# Altium PCB Palletto_V2.PcbDoc (part 1 of 2)
Units mil, origin at the board's own origin, x right, y up, seen from the top; angles counter-clockwise.
Board outline 7345 x 9595 mil, 2 copper layers (Top Layer, Bottom Layer); 77 components, 98 nets, 384 pads, 99 vias.
Unrouted connection lines stored in the file: 1.
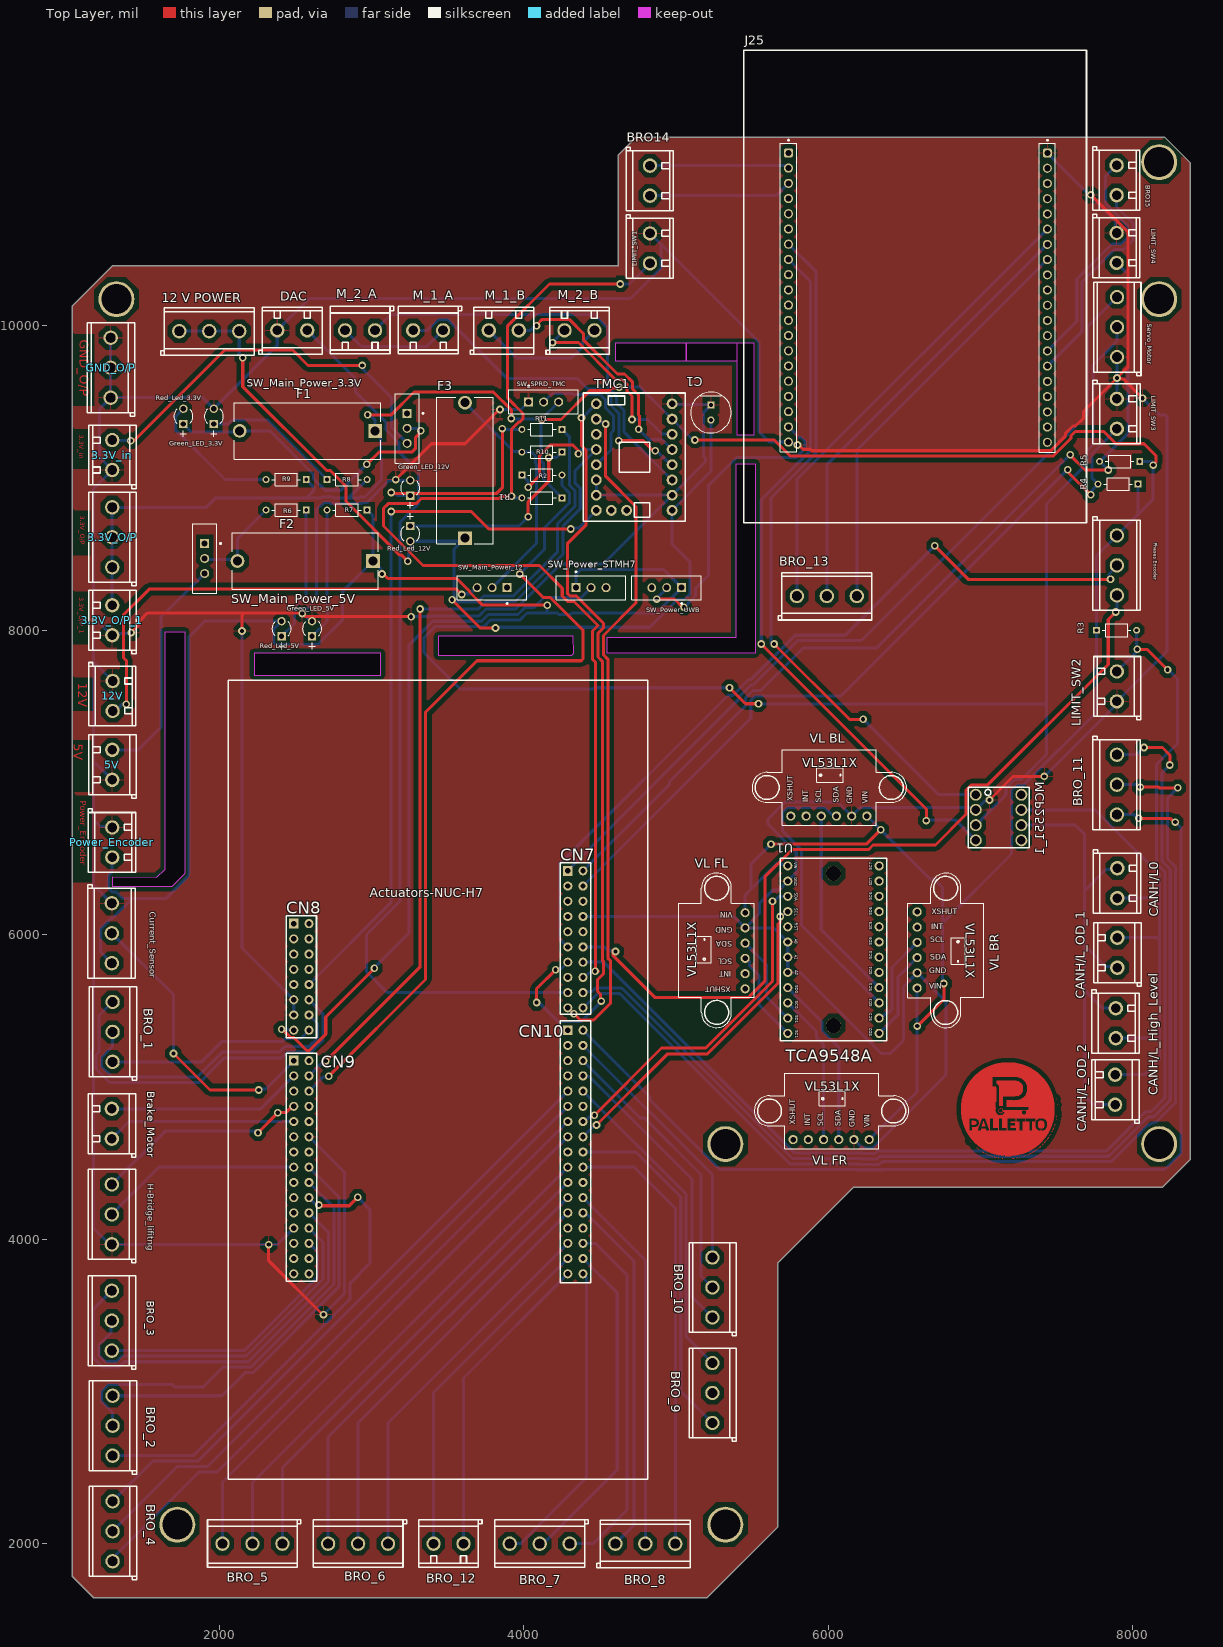
[diagram p0: Top Layer view]
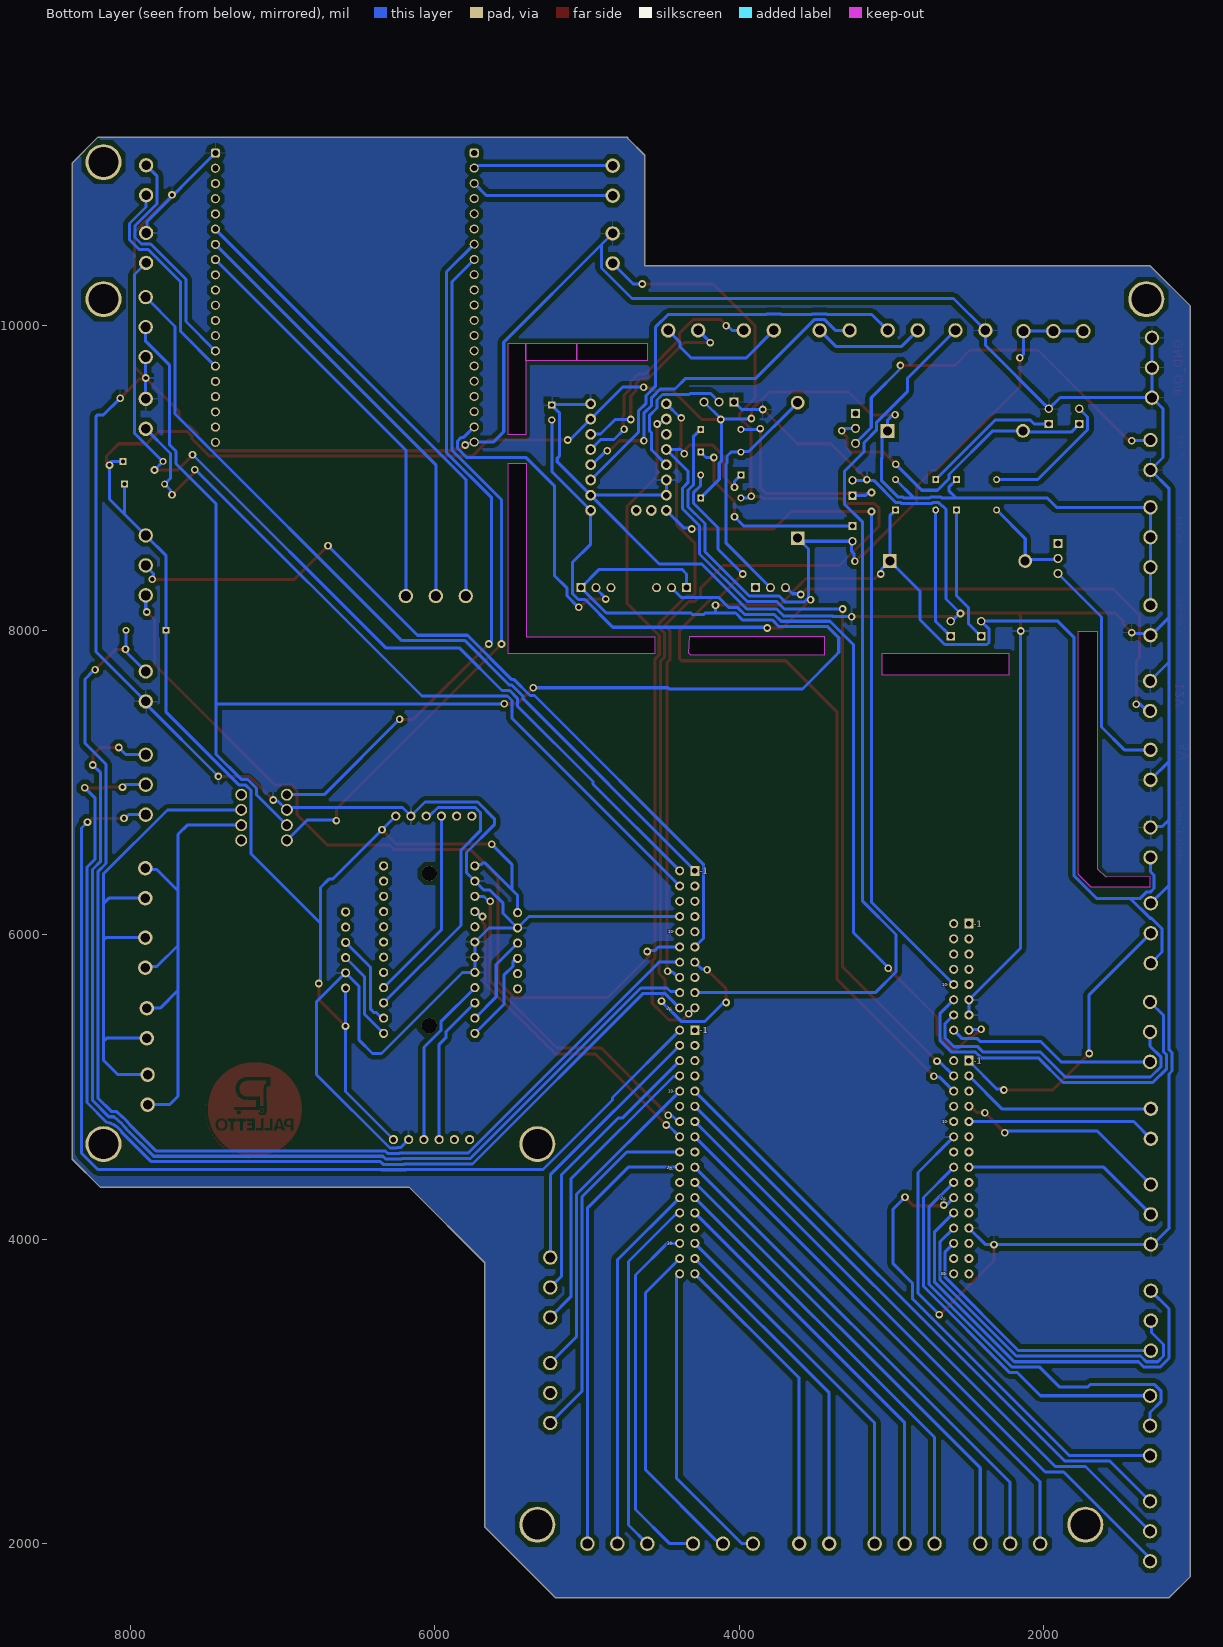
[diagram p1: Bottom Layer view, seen from below]

## Layer stack, top to bottom
Top Solder: solder mask 0.4, Solder Resist, Dk 3.5
Top Layer: signal copper 1.4
Dielectric 1: dielectric 12.6, FR-4, Dk 4.8
Bottom Layer: signal copper 1.4
Bottom Solder: solder mask 0.4, Solder Resist, Dk 3.5

## Board outline
4730,11240 4730,11230 4620,11120 4620,10395 1300,10395 1035,10130 1035,1785 1175,1645 5205,1645 5670,2110 5670,3845 6165,4340 8195,4340 8380,4525 8380,11070 8210,11240
cut-out: 3060,7850 2230,7850 2230,7705 3060,7705
cut-out: 4325,7960 3440,7960 3440,7835 4315,7835 4330,7850
cut-out: 5520,9095 5520,7850 4550,7850 4550,7955 5395,7955 5395,9095
cut-out: 5067.5,9770 5067.5,9885 4602.5,9885 4602.5,9770
cut-out: 5402.5,9770 5402.5,9885 5067.5,9885 5067.5,9770
cut-out: 5400,9285 5515,9285 5515,9885 5400,9885
cut-out: 1775,7990 1775,6400 1690,6315 1300,6315 1300,6380.19 1589.48,6378.84 1645,6430.67 1645,7990 1660,7990

## Design rules (kind name [scope] priority, off if disabled: settings)
Clearance Clearance_Polygon [InPolygon] p1: gap=27.56 ignorepadtopadclearanceinfootprint=TRUE
Clearance Clearance_1 [All] p2: gap=15.75 ignorepadtopadclearanceinfootprint=FALSE except(23.62: Fill-Fill Fill-Poly Fill-Region Fill-Text Fill-Hole Poly-Poly Poly-Region Poly-Text Poly-Hole Region-Region Region-Text Region-Hole)
HoleSize [All] p1: absolutevalues=TRUE maxlimit=1000 minlimit=1 maxpercent=80.000 minpercent=20.000
MinimumSolderMaskSliver [All] p1: minsoldermaskwidth=0
PlaneClearance [All] p1: clearance=30
PlaneConnect [All] p1: planeconnectstyle=Relief reliefexpansion=20 reliefentries=4 reliefconductorwidth=10 reliefairgap=30
PolygonConnect [All] p1: connectstyle=Relief reliefconductorwidth=10 reliefentries=4 polygonreliefangle="90 Angle" airgapwidth=30
RoutingVias [All] p1: holewidth=28 width=59.06 viastyle="Through Hole" minholewidth=23.62 minwidth=55.12 maxholewidth=30 maxwidth=65
SilkToSilkClearance [All] p1: silktosilkclearance=0
SilkToSolderMaskClearance [IsPad] p1: minsilkscreentomaskgap=0 clearancetoexposedcopper=TRUE
SolderMaskExpansion [All] p1: expansion=4 istentingtop=FALSE
UnRoutedNet [All] p1: checkbadconnections=TRUE
Width [All] p1: maxlimit=118.11 minlimit=15.75 preferedwidth=20 bottomlayer_maxwidth=118.11 minimp=50.000000 maximp=50.000000 favimp=50.000000
23 further rules are at their usual default settings.

## Classes and differential pairs
component class STM32H755_Breakout_Schematic: Actuators-NUC-H7 R2 SW_Power_STMH7
component class Sensors_Schematic: "12 V POWER" 12V 12V_IN C1 Current_Sensor F3 Green_LED_12V J25 M_1_A M_1_B M_2_A M_2_B R10 R11 Red_Led_12V Servo_Motor SW_Main_Power_12 SW_Power_UWB SW_SPRD_TMC TMC1 U1 "VL BL" "VL BR" "VL FL" "VL FR"
component class Actuators_Schematic: 3.3V_in 3.3V_O/P 3.3V_O/P_1 5V Brake_Motor BRO14 BRO15 BRO_1 BRO_2 BRO_3 BRO_4 BRO_5 BRO_6 BRO_7 BRO_8 BRO_9 BRO_10 BRO_11 BRO_12 BRO_13 CANH/L0 CANH/L_High_Level CANH/L_OD_1 CANH/L_OD_2 DAC F1 F2 GND_O/P Green_LED_3.3V Green_LED_5V H-Bridge_lifitng LIMIT_SW1 LIMIT_SW2 LIMIT_SW3 LIMIT_SW4 MCP2551_1 "Phases Encoder" Power_Encoder R1 R3 R4 R5 R6 R7 R8 R9 Red_Led_3.3V Red_Led_5V SW_Main_Power_3.3V SW_Main_Power_5V

## Components (designator, comment, footprint, x,y, rotation, side; value= is the part's Value field where it differs from the comment)
3.3V_in "3.3V_In" CONN-TH_P5.00_KF126-5.0-2P 1297.5,9151.3 r270 top
3.3V_O/P "3P-Terminal" CONN-TH_3P-P5.00_KF126-5.0-3P 1297.5,8611.03 r270 top
3.3V_O/P_1 "KF126-5.0-2P" CONN-TH_P5.00_KF126-5.0-2P 1297.5,8065.76 r270 top
5V "KF126-5.0-2P" CONN-TH_P5.00_KF126-5.0-2P 1297.5,7116.3 r270 top
"12 V POWER" "3P-Terminal" CONN-TH_3P-P5.00_KF126-5.0-3P 1935,9965 r180 top
12V "12V_IN" CONN-TH_P5.00_KF126-5.0-2P 1300,7568.43 r90 top
Actuators-NUC-H7 "NUCLEO-H755ZI-ZIO" NUCLEO-H7 2190,4773 r0 top
Brake_Motor "KF126-5.0-2P" CONN-TH_P5.00_KF126-5.0-2P 1295,4758.42 r270 top
BRO14 "KF126-5.0-2P" CONN-TH_P5.00_KF126-5.0-2P 4830,10953.43 r90 top
BRO15 "KF126-5.0-2P" CONN-TH_P5.00_KF126-5.0-2P 7895,10956.58 r90 top
BRO_1 "3P-Terminal" CONN-TH_3P-P5.00_KF126-5.0-3P 1300,5361.84 r270 top
BRO_2 "3P-Terminal" CONN-TH_3P-P5.00_KF126-5.0-3P 1300,2775 r270 top
BRO_3 "3P-Terminal" CONN-TH_3P-P5.00_KF126-5.0-3P 1295,3465 r270 top
BRO_4 "3P-Terminal" CONN-TH_3P-P5.00_KF126-5.0-3P 1300,2081.84 r270 top
BRO_5 "3P-Terminal" CONN-TH_3P-P5.00_KF126-5.0-3P 2218.69,2000 r0 top
BRO_6 "3P-Terminal" CONN-TH_3P-P5.00_KF126-5.0-3P 2912.38,2000 r0 top
BRO_7 "3P-Terminal" CONN-TH_3P-P5.00_KF126-5.0-3P 4105.66,2000 r0 top
BRO_8 "3P-Terminal" CONN-TH_3P-P5.00_KF126-5.0-3P 4799.34,2000 r180 top
BRO_9 "3P-Terminal" CONN-TH_3P-P5.00_KF126-5.0-3P 5240,2990 r270 top
BRO_10 "3P-Terminal" CONN-TH_3P-P5.00_KF126-5.0-3P 5240,3683.15 r270 top
BRO_11 "3P-Terminal" CONN-TH_3P-P5.00_KF126-5.0-3P 7897.12,6985.77 r90 top
BRO_12 "KF126-5.0-2P" CONN-TH_P5.00_KF126-5.0-2P 3506.58,2000 r0 top
BRO_13 "3P-Terminal" CONN-TH_3P-P5.00_KF126-5.0-3P 5991.84,8225 r180 top
C1 "EEUFM1E101B" FP-RAD-TH-D_6_3_0_5-L_11-MFG 5230,9430 r270 top
CANH/L0 "KF126-5.0-2P" CONN-TH_P5.00_KF126-5.0-2P 7900,6339.08 r90 top
CANH/L_High_Level "KF126-5.0-2P" CONN-TH_P5.00_KF126-5.0-2P 7890,5419.08 r90 top
CANH/L_OD_1 "KF126-5.0-2P" CONN-TH_P5.00_KF126-5.0-2P 7900,5882.5 r270 top
CANH/L_OD_2 "KF126-5.0-2P" CONN-TH_P5.00_KF126-5.0-2P 7885,4982.5 r270 top
Current_Sensor "3P-Terminal" CONN-TH_3P-P5.00_KF126-5.0-3P 1295,6010 r90 top
DAC "KF126-5.0-2P" CONN-TH_P5.00_KF126-5.0-2P 2480,9970 r180 top
F1 "0PTF0078P" FP-0PTF0078P-MFG 2580,9310 r180 top
F2 "0PTF0078P" FP-0PTF0078P-MFG 2565,8455 r180 top
F3 "0PTF0078P" FP-0PTF0078P-MFG 3615,9050 r90 top
GND_O/P "3P-Terminal" CONN-TH_3P-P5.00_KF126-5.0-3P 1287.5,9724.72 r270 top
Green_LED_3.3V "WP710A10QBC/D" KING-WP710A10QBCD_V 1965,9405 r90 top
Green_LED_5V "WP710A10QBC/D" KING-WP710A10QBCD_V 2610,8010 r90 top
Green_LED_12V "WP710A10QBC/D" KING-WP710A10QBCD_V 3255,8935 r90 top
H-Bridge_lifitng "3P-Terminal" CONN-TH_3P-P5.00_KF126-5.0-3P 1295,4163.15 r270 top
J25 "BU04" BU04_KIT_N 5290,10750 r0 top
LIMIT_SW1 "LIMIT_SW" CONN-TH_P5.00_KF126-5.0-2P 4830,10508.43 r90 top
LIMIT_SW2 "LIMIT_SW" CONN-TH_P5.00_KF126-5.0-2P 7897.12,7631.03 r270 top
LIMIT_SW3 "LIMIT_SW" CONN-TH_P5.00_KF126-5.0-2P 7897.12,9421.58 r90 top
LIMIT_SW4 "LIMIT_SW" CONN-TH_P5.00_KF126-5.0-2P 7895,10511.58 r90 top
M_1_A "" CONN-TH_P5.00_KF126-5.0-2P 3372.13,9970 r0 top
M_1_B "" CONN-TH_P5.00_KF126-5.0-2P 3870,9970 r180 top
M_2_A "" CONN-TH_P5.00_KF126-5.0-2P 2925.28,9970 r0 top
M_2_B "" CONN-TH_P5.00_KF126-5.0-2P 4366.85,9970 r180 top
MCP2551_1 "8 PIN DIP SOCKET" "DIP 8 PIN SOCKET" 7120,6770 r270 top
"Phases Encoder" "3P-Terminal" CONN-TH_3P-P5.00_KF126-5.0-3P 7897.12,8426.31 r90 top
Power_Encoder "KF126-5.0-2P" CONN-TH_P5.00_KF126-5.0-2P 1297.5,6606.31 r90 top
R1 "10K" FP-MFR-12-MFG 4120,8870 r180 top
R2 "10K" FP-MFR-12-MFG 4120,9020 r0 top
R3 "10K" FP-MFR-12-MFG 7895,8000 r0 top
R4 "10K" FP-MFR-12-MFG 7905,8960 r180 top
R5 "10K" FP-MFR-12-MFG 7915,9110 r180 top
R6 "1K" FP-MFR-12-MFG 2440,8790 r180 top
R7 "1K" FP-MFR-12-MFG 2840,8790 r180 top
R8 "1K" FP-MFR-12-MFG 2840,8990 r0 top
R9 "1K" FP-MFR-12-MFG 2440,8990 r180 top
R10 "1K" FP-MFR-12-MFG 4120,9170 r180 top
R11 "1K" FP-MFR-12-MFG 4120,9320 r180 top
Red_Led_3.3V "WP710A10QBC/D" KING-WP710A10QBCD_V 1765,9405 r90 top
Red_Led_5V "WP710A10QBC/D" KING-WP710A10QBCD_V 2410,8010 r90 top
Red_Led_12V "WP710A10QBC/D" KING-WP710A10QBCD_V 3255,8635 r270 top
Servo_Motor "3P-Terminal" CONN-TH_3P-P5.00_KF126-5.0-3P 7897.84,9991.84 r270 top
SW_Main_Power_3.3V "EG1218" ESWI-EG1218_V 3235,9326.57 r270 top
SW_Main_Power_5V "EG1218" ESWI-EG1218_V 1905,8471.57 r270 top
SW_Main_Power_12 "EG1218" ESWI-EG1218_V 3793.43,8280 r180 top
SW_Power_STMH7 "EG1218" ESWI-EG1218_V 4443.15,8280 r0 top
SW_Power_UWB "EG1218" ESWI-EG1218_V 4940,8280 r180 top
SW_SPRD_TMC "EG1218" ESWI-EG1218_V 4131.57,9500 r0 top
TMC1 "TMC2209 Socket" COMM-TH_TMC2209SILENTSTEPSTICK 4726.18,9137.5 r0 top
U1 "TCA9548A" TCA9548A 6035,5902.5 r0 top
"VL BL" "VL53L1X" VL53L1X_BREAKOUT 5755,6780 r0 top
"VL BR" "VL53L1X" VL53L1X_BREAKOUT 6585,6150 r270 top
"VL FL" "VL53L1X" VL53L1X_BREAKOUT 5455,5645 r90 top
"VL FR" "VL53L1X" VL53L1X_BREAKOUT 5770,4655 r0 top

## Footprints (in the part's own frame and the unit in brackets; to place one, negate y for a bottom-side part, rotate by r counter-clockwise, add the part's x,y. Pads: shape width x height; smd on the part's side, far side on the other; paste and mask are expansions set on the pad)
BU04_KIT_N [mm] "BU04_KIT"
  rrect50% 1.52x1.52 hole 1.02: 1(11.422,9.806) 21(54.61,9.779)
  round 1.52 hole 1.02: 2(11.422,7.266) 3(11.422,4.726) 4(11.422,2.186) 5(11.422,-0.354) 6(11.422,-2.894) 7(11.422,-5.434) 8(11.422,-7.974) 9(11.422,-10.514) 10(11.422,-13.054) 11(11.422,-15.594) 12(11.422,-18.134) 13(11.422,-20.674) 14(11.422,-23.214) 15(11.422,-25.754) 16(11.422,-28.294) 17(11.422,-30.834) 18(11.422,-33.374) 19(11.422,-35.914) 20(11.422,-38.454) 22(54.61,7.239) 23(54.61,4.699) 24(54.61,2.159) 25(54.61,-0.381) 26(54.61,-2.921) 27(54.61,-5.461) 28(54.61,-8.001) 29(54.61,-10.541) 30(54.61,-13.081) 31(54.61,-15.621) 32(54.61,-18.161) 33(54.61,-20.701) 34(54.61,-23.241) 35(54.61,-25.781) 36(54.61,-28.321) 37(54.61,-30.861) 38(54.61,-33.401) 39(54.61,-35.941) 40(54.61,-38.481)
  silkscreen extent 4,-51.94 61.15,26.93, body extent 10.17,-40 55.86,11.33, height 8.55
COMM-TH_TMC2209SILENTSTEPSTICK [mm]
  round 1.8 hole 1.1 paste-2539.97 mask+0.051: 1(6.32,8.89) 2(6.32,6.35) 3(6.32,3.81) 4(6.32,1.27) 5(6.32,-1.27) 6(6.32,-3.81) 7(6.32,-6.35) 8(6.32,-8.89) 9(-6.32,8.89) 10(-6.32,6.35) 11(-6.32,3.81) 12(-6.32,1.27) 13(-6.32,-1.27) 14(-6.32,-3.81) 15(-6.32,-6.35) 16(-6.32,-8.89) 17(-3.81,-8.89) 18(-1.27,-8.89)
  silkscreen extent -8.5,-10.7 8.5,10.7
CONN-TH_3P-P5.00_KF126-5.0-3P [mm]
  round 2.4 hole 1.6 slot 1.605 at 0 deg paste-2539.97 mask+0.051: 1(-5,0) 2(0,0) 3(5,0)
  silkscreen extent -7.5,-3.9 8.09,4
CONN-TH_P5.00_KF126-5.0-2P [mm]
  round 2.4 hole 1.6 paste-2539.97 mask+0.102: 1(-2.5,0) 2(2.5,0)
  silkscreen extent -5,-3.9 5.59,4
"DIP 8 PIN SOCKET" [mm]
  round 2 hole 1.4 paste-2539.97 mask+0.102: 1(-3.81,-3.81) 2(-1.27,-3.81) 3(1.27,-3.81) 4(3.81,-3.81) 5(3.81,3.81) 6(1.27,3.81) 7(-1.27,3.81) 8(-3.81,3.81)
  silkscreen extent -5.08,-5.08 5.08,5.08
ESWI-EG1218_V [mm] "THD, 3-Leads, Body 11.6x4mm, Pitch 2.5mm"
  rect 1.5x1.5 hole 1: 1(-2.5,0)
  round 1.5 hole 1: 2(0,0) 3(2.5,0)
  silkscreen extent -5.8,-2 5.8,2.78, body extent -5.8,-2 5.8,2, height 7.4
FP-0PTF0078P-MFG [mm]
  rect 2.3x2.3 hole 1.5 paste-2539.97 mask+0: 1(-11.3,0)
  round 2.3 hole 1.5 paste-2539.97 mask+0: 2(11.3,0)
  silkscreen extent -12.2,-4.7 12.2,4.7, body extent -12.55,-4.8 12.55,4.8, height 0.25
FP-MFR-12-MFG [mm]
  rect 1.15x1.15 hole 0.65 paste-2539.97 mask+0: 1(-3.35,0)
  round 1.15 hole 0.65 paste-2539.97 mask+0: 2(3.35,0)
  silkscreen extent -2.38,-1.05 2.38,1.05, body extent -4.03,-1.15 4.03,1.15, height 0.25
FP-RAD-TH-D_6_3_0_5-L_11-MFG [mm]
  rect 1.2x1.2 hole 0.7 paste-2539.97 mask+0: 1(-1.25,0)
  round 1.2 hole 0.7 paste-2539.97 mask+0: 2(1.25,0)
  silkscreen extent -3.4,-3.4 3.4,3.4, body extent -3.14,-3.14 3.15,3.16, height 12.7
KING-WP710A10QBCD_V [mm] "THD, 2-Leads, Dia 3.2mm"
  rect 1.4x1.4 hole 0.889 paste-2539.97 mask+0.064: 1(-1.27,0)
  round 1.4 hole 0.889 paste-2539.97 mask+0.064: 2(1.27,0)
  silkscreen extent -3.39,-1.6 1.16,1.6
NUCLEO-H7 [mm]
  rect 1.52x1.65 hole 0.914 paste-2539.97 mask+0.051: 145(7.62,33.02) 161(7.62,10.16) 191(53.34,41.834) 211(53.34,15.24)
  round 1.52 hole 0.89 paste-2539.97 mask+0.051: 146(10.16,33.02) 147(7.62,30.48) 148(10.16,30.48) 149(7.62,27.94) 150(10.16,27.94) 151(7.62,25.4) 152(10.16,25.4) 153(7.62,22.86) 154(10.16,22.86) 155(7.62,20.32) 156(10.16,20.32) 157(7.62,17.78) 158(10.16,17.78) 159(7.62,15.24) 160(10.16,15.24) 162(10.16,10.16) 163(7.62,7.62) 164(10.16,7.62) 165(7.62,5.08) 166(10.16,5.08) 167(7.62,2.54) 168(10.16,2.54) 169(7.62,0) 170(10.16,0) 171(7.62,-2.54) 172(10.16,-2.54) 173(7.62,-5.08) 174(10.16,-5.08) 175(7.62,-7.62) 176(10.16,-7.62) 177(7.62,-10.16) 178(10.16,-10.16) 179(7.62,-12.7) 180(10.16,-12.7) 181(7.62,-15.24) 182(10.16,-15.24) 183(7.62,-17.78) 184(10.16,-17.78) 185(7.62,-20.32) 186(10.16,-20.32) 187(7.62,-22.86) 188(10.16,-22.86) 189(7.62,-25.4) 190(10.16,-25.4) 192(55.88,41.834) 193(53.34,39.294) 194(55.88,39.294) 195(53.34,36.754) 196(55.88,36.754) 197(53.34,34.214) 198(55.88,34.214) 199(53.34,31.674) 200(55.88,31.674) 201(53.34,29.134) 202(55.88,29.134) 203(53.34,26.594) 204(55.88,26.594) 205(53.34,24.054) 206(55.88,24.054) 207(53.34,21.514) 208(55.88,21.514) 209(53.34,18.974) 210(55.88,18.974) 212(55.88,15.24) 213(53.34,12.7) 214(55.88,12.7) 215(53.34,10.16) 216(55.88,10.16) 217(53.34,7.62) 218(55.88,7.62) 219(53.34,5.08) 220(55.88,5.08) 221(53.34,2.54) 222(55.88,2.54) 223(53.34,0) 224(55.88,0) 225(53.34,-2.54) 226(55.88,-2.54) 227(53.34,-5.08) 228(55.88,-5.08) 229(53.34,-7.62) 230(55.88,-7.62) 231(53.34,-10.16) 232(55.88,-10.16) 233(53.34,-12.7) 234(55.88,-12.7) 235(53.34,-15.24) 236(55.88,-15.24) 237(53.34,-17.78) 238(55.88,-17.78) 239(53.34,-20.32) 240(55.88,-20.32) 241(53.34,-22.86) 242(55.88,-22.86) 243(53.34,-25.4) 244(55.88,-25.4)
  silkscreen extent -3.29,-59.67 66.71,73.67
TCA9548A [mil]
  round 60 hole 36 paste-99999 mask+2: 1(-300,550) 2(-300,450) 3(-300,350) 4(-300,250) 5(-300,150) 6(-300,50) 7(-300,-50) 8(-300,-150) 9(-300,-250) 10(-300,-350) 11(-300,-450) 12(-300,-550) 13(300,-550) 14(300,-450) 15(300,-350) 16(300,-250) 17(300,-150) 18(300,-50) 19(300,50) 20(300,150) 21(300,250) 22(300,350) 23(300,450) 24(300,550)
  round 100 hole 100 unplated paste-99999: ""(0,-500) ""(0,500)
  silkscreen extent -350,-600 350,600
VL53L1X_BREAKOUT [mil]
  round 60 hole 36 paste-99999 mask+4: 1(0,0) 2(100,0) 3(200,0) 4(300,0) 5(400,0) 6(500,0)
  silkscreen extent -255,-61 760,436

## Part data
3.3V_in 12V LIMIT_SW1 LIMIT_SW2 LIMIT_SW3 LIMIT_SW4 M_1_A M_1_B M_2_A M_2_B: library part KF126-5.0-2P, Manufacturer="Cixi Kefa Elec", Contributor=LCSC, Manufacturer Part=KF126-5.0-2P, spicePre=P, spiceSymbolName=KF126-5.0-2P, Supplier=LCSC, Supplier Part=C474900
3.3V_O/P "12 V POWER" BRO_1 BRO_2 BRO_3 BRO_4 BRO_5 BRO_6 BRO_7 BRO_8 BRO_9 BRO_10 BRO_11 BRO_13 Current_Sensor GND_O/P H-Bridge_lifitng "Phases Encoder" Servo_Motor: library part "Limit Switch", JLCPCB Part Class="Extended Part", Manufacturer="Cixi Kefa Elec", Manufacturer Part=KF126-5.0-3P, Contributor=thulasikrishna, spicePre=U, spiceSymbolName=KF126-5.0-3P, Supplier=LCSC, Supplier Part=C474901
3.3V_O/P_1 5V Brake_Motor BRO14 BRO15 BRO_12 CANH/L0 CANH/L_High_Level CANH/L_OD_1 CANH/L_OD_2 DAC Power_Encoder: Manufacturer="Cixi Kefa Elec", Contributor=LCSC, Manufacturer Part=KF126-5.0-2P, spicePre=P, spiceSymbolName=KF126-5.0-2P, Supplier=LCSC, Supplier Part=C474900
Actuators-NUC-H7: Package Display=Yes, Contributor=zutawin, Mounted=Yes, spicePre=X, spiceSymbolName=NUCLEO-H755ZI-ZIO, Supplier=DOLI, Supplier Part=100x
C1: library part CMP-05427-000856-1, "Aluminum Electrolytic Capacitors (Radial Lead Type) 100uF ±20% 25V", Capacitance=100uF, Case/Package=Radial, ESR (Equivalent Series Resistance)=130mR, Max Operating Temperature=105°C, Min Operating Temperature=-40°C, Package Quantity=2000, Ripple Current=455mA, Tolerance=20%, Voltage Rating=25V, Diameter=6mm, Height - Seated (Max)=0.5inch, Impedance=130mR, Lead Diameter=0.5mm, Lead Pitch=5mm, Length=11mm, Life (Hours)=2000Hour, Mount="Through Hole", Packaging="Tape and Reel", Polarity=Polar, RoHS Compliant=Yes, Series=FM, Termination=Radial, Voltage Rating (DC)=25V
F1 F2 F3: library part CMP-08604-000023-1, "FUSE BLOCK CARTRIDGE PCB", Ambient Temperature Range High=+85°C, Ambient Temperature Range Low=-30°C, Fuse Current=6.3A, Manufacturer="Littelfuse Inc", Package=0, Voltage Rating Ac=250V, Automotive=No, Category=Fuse, ComponentLink2Description=Datasheet, ComponentLink2URL=https://media.digikey.com/pdf/Data%20Sheets/Littelfuse%20PDFs/PTF075_77_78.pdf, Conn Orientation=Vertical, Device Class L1="Circuit Protection", Device Class L2="Fuse Holders", Device Class L3=unset, Digikey Description="FUSE BLOCK CARTRIDGE PCB", Height=11.5mm, Lead Free=Yes, Manufacturer Part Number=0PTF0078P, Mouser Description="Fuse Holder 5X20MM Pitch 22/7 UL94V0 Open", Number Of Fuses=1, Octopart=https://octopart.com/0ptf0078p-littelfuse-13255855, RoHS=TRUE, Voltage Rating Dc=250V
Green_LED_3.3V Green_LED_5V Green_LED_12V Red_Led_3.3V Red_Led_5V Red_Led_12V: library part CMP-2000-07416-1, "Blue LED, 3.3 V, 20 mA, -40 to 85 degC, 2-Pin THD, RoHS, Bulk", Forward Current=20mA, Forward Voltage=3.3V, Illumination Color=Blue, Lens Color/Style=WaterClear, Manufacturer=Kingbright, Maximum Operating Temperature=+85C, Minimum Operating Temperature=-40C, Package Description="2-Pin Through Hole Device, Dia 3.2 mm", Package Reference=WP710A10QBCD, Wavelength/Color Temperature=470nm, Datasheet URL=https://datasheet.ciiva.com/2121/wp710a10qbc-d-2121617.pdf, Datasheet Version="Rev. 5B, 09/2014", Factory Pack Quantity=500, LED Size=T-1, Lens Dimensions=3mmx4.6mm, Lens Shape=Dome, Luminous Intensity=1600mcd, Manufacturer URL=http://www.kingbright.com/, Mounting Style=ThroughHole, Mounting Technology=ThroughHole, Packaging=Bulk, Product Category=StandardLEDs-ThroughHole, RoHS=Details, Type=SolidStateLEDLamp, Viewing Angle=20deg
J25: "BU04_KIT", Contact Resistance=20mΩ, Current Rating=3A, Operating Supply Voltage=250V, Gender=Female, Lead Pitch=2.54mm, Number of Pins=40, Orientation=Vertical
R1 R2 R3 R4 R5 R6 R7 R8 R9 R10 R11: library part CMP-03413-000012-1, "RES MF 1/6W 1% AXIAL", Max Operating Temperature=155°C, Min Operating Temperature=-55°C, Power Rating=160mW, Resistance=10kR, Tolerance=1%, Voltage Rating=200V, Packaging="Ammo Pack", Termination=Axial, Voltage Rating (DC)=200V
SW_Main_Power_3.3V SW_Main_Power_5V SW_Main_Power_12 SW_Power_STMH7 SW_Power_UWB SW_SPRD_TMC: library part CMP-1696-00002-1, "Slide Switch, 500 V, -20 to 70 degC, 3-Pin THD, RoHS", Case\Package=SOT-23-5, Dropout Voltage="300 mV", Max Input Voltage="8 V", Max Operating Temperature="85 degC", Max Ouput Current="150 mA", Max Power Dissipation="250 mW", Min Input Voltage="4.3 V", Min Operating Temperature="-40 degC", Nominal Output Voltage="3.3 V", Package Quantity=3000, ComponentLink1Description="Manufacturer URL", ComponentLink1URL=http://www.e-switch.ch/en/, ComponentLink2Description=Datasheet, ComponentLink2URL=https://www.e-switch.com/system/asset/product_line/data_sheet/119/EG.pdf, DatasheetVersion=Oct-15, Height="1.3 mm", Length="3 mm", Mount="Surface Mount", Output Current="150 mA", Output Voltage="3.3 V", Outputs=1, PackageDescription="3-Pin Through Hole Device, Body 11.6 x 4 mm, Pitch 2.5 mm", PackageReference=EG1218, Packaging="Tape and Reel", Pins=5, Power Rating="250 mW", Radiation Hardening=No, REACH SVHC="No SVHC", RoHSCompliant=true, Width="1.8 mm"
TMC1: JLCPCB Part Class="Extended Part", Manufacturer=TRINAMIC, Contributor=plcis, Manufacturer Part="TMC2209 Socket", spicePre=U, spiceSymbolName="TMC2209 Socket", Supplier=LCSC, Supplier Part=C17375345
U1: Manufacturer="Texas Instruments", Contributor=Dompie, link=https://www.adafruit.com/product/2717, Manufacturer Part=TCA9548A, spicePre=U, spiceSymbolName=TCA9548A, Supplier=Adafruit, Supplier Part=2717
"VL BL" "VL BR" "VL FL" "VL FR": library part "VL53L1X_BREAKOUT COPY", Manufacturer Part="VL53L0X Time-of-Flight Distance Sensor VL53L0X", Contributor=freddyka, spicePre=U, spiceSymbolName="VL53L1X_BREAKOUT COPY"
MCP2551_1: Contributor=uniqengineeringworks, spicePre=U, spiceSymbolName="8 PIN DIP SOCKET", Supplier=LCSC

## Free pads (board coordinates)
  round 236.22 hole 196.85 unplated paste-99999 mask+4: 4(1325,10175) 4(1725,2125) 4(5325,2125) 4(5325,4625) 4(8175,4625) 4(8175,10175) 4(8175,11075)

## Via types
v1: diameter 50, hole 28, Top Layer to Bottom Layer, 99 vias

## Nets (pads, with @x,y where several pads share a name; then routed paths per layer and width w, separated by ;. In a path a pad name is that pad's centre, name@x,y a point inside that pad or via, vN(x,y) a via of type N, cw(c..) or ccw(c..) an arc to the next point about the centre after c; other vN are vias at no path point)
"3.3 V": 3.3V_O/P.1 3.3V_O/P.2 3.3V_O/P.3 3.3V_O/P_1.1 "Phases Encoder.3" "VL BL.6" "VL BR.6" "VL FL.6" "VL FR.6" F1.1 R1.1 R3.1 R4.1 R5.1 R8.2 R9.1 SW_SPRD_TMC.3 TMC1.2 U1.1 | length 18172.3
  Top Layer w20: v1(2975,9415) 3129.53,9415 3280.44,9565.91 3800.86,9565.91 3918.96,9447.81 v1(3918.96,9391.04) ; v1(4120,9385) 4245,9385 4434.12,9574.12 4562.14,9574.12 4579.42,9591.4 4621.4,9591.4 v1(4627.14,9597.14) ; v1(5125,9250) 5647.02,9250 5753.44,9143.58 7477.87,9143.58 7594.25,9259.97 7594.25,9276.02 7623.98,9305.75 7811.3,9305.75 7891.67,9225.37 8074.63,9225.37 8155,9145 8155,9105 v1(8135,9085) ; v1(5625,6595) 6250,6595 v1(6345,6690) ; v1(6585,5400) 6760,5575 v1(6760,5680)
  Bottom Layer w20: 3.3V_O/P_1.1@1297.5,8164.19 3.3V_O/P.3@1297.5,8414.19 3.3V_O/P.2@1297.5,8611.03 3.3V_O/P.1@1297.5,8807.88 1915.27,8807.88 1977.39,8870 2575,8870 ; R9.1@2571.89,8990 2621.89,8940 2621.89,8916.89 2575,8870 ; R8.2@2971.89,8990 2851.89,8870 ; v1@2990,9415 3024.88,9380.12 F1.1@3024.88,9310 3060.16,9274.72 3060.16,9132.28 3065,9127.44 3065,8985 2954.13,8874.13 2923.78,8874.13 2919.65,8870 2851.89,8870 ; v1(3918.96,9391.04) 3921.98,9388.02 4116.98,9388.02 v1@4117.5,9387.5 ; v1(4120,9385) v1@4117.5,9387.5 ; SW_SPRD_TMC.3@4230,9500 v1@4117.5,9387.5 ; R1.1@4251.89,8870 4130,8991.89 4130,9098.23 4114.25,9113.98 4114.25,9384.25 v1@4117.5,9387.5 ; v1(4627.14,9597.14) 4765.37,9597.14 TMC1.2@4975,9387.5 5112.5,9250 v1(5125,9250) ; 5455,6145 5455,6260 5492.5,6297.5 ; v1(5625,6595) 5492.5,6462.5 5492.5,6297.5 ; U1.1@5735,6452.5 5727.35,6460.15 5694.85,6460.15 5685,6470 5665,6470 5492.5,6297.5 ; 6255,6780 v1(6345,6690) 6670,6365 6695,6365 6750,6310 6750,6075 ; 6270,4655 6585,4970 6585,5650 ; v1@6750,5670 6750,6075 ; R4.1@8036.89,8960 8036.89,8762.92 ; R5.1@8046.89,9110 8123.28,9110 8135,9098.28 v1(8135,9085) 8135,8861.03 8036.89,8762.92 ; 2575,8870 2669.13,8870 2673.26,8874.13 2742.96,8874.13 2747.09,8870 2851.89,8870 ; 6750,6075 7204.88,6529.88 7204.88,6946.97 7243.03,6985.12 7285.67,6985.12 7763.11,7462.55 R3.1@7763.11,8000 7763.11,8489.14 7897.12,8623.15 8036.89,8762.92
5V: Current_Sensor.1 F2.1 MCP2551_1.3 Power_Encoder.1 R7.1 Red_Led_5V.2 Servo_Motor.2 SW_Power_STMH7.1 SW_Power_UWB.1 | length 17134.2
  Top Layer w20: v1(3070,8370) 3078.12,8370 3107.81,8340.31 3560.31,8340.31 3614.56,8286.06 3615.27,8286.06 3645,8256.33 3645,8251.83 3731.83,8165 v1(4154.44,8165) ; v1(5352.4,7622.6) 5457.5,7517.5 v1(5542.5,7517.5)
  Bottom Layer w20: Current_Sensor.1@1295,5813.15 1222.01,5886.14 1222.01,6040.23 1290.19,6108.42 1299.81,6108.42 1428.46,6237.07 ; Power_Encoder.1@1297.5,6507.88 1297.5,6414.1 1274.25,6390.85 1274.25,6304.33 1298.75,6279.83 1325.23,6279.83 1367.99,6237.07 1428.46,6237.07 ; R7.1@2971.89,8790 3009.88,8752.01 F2.1@3009.88,8455 ; v1(3070,8370) 3064.26,8375.74 3064.26,8400.62 F2.1@3009.88,8455 ; v1(4154.44,8165) 4154.44,8113.07 ; SW_Power_STMH7.1@4344.72,8280 4344.72,8369.72 4375,8400 4918.43,8400 SW_Power_UWB.1@5038.43,8280 4871.49,8113.07 4315.39,8113.07 4304.57,8102.25 4232.91,8102.25 4222.09,8113.07 4154.44,8113.07 ; v1(5352.4,7622.6) 4467.73,7622.6 4460.13,7615 3583.59,7615 3359.25,7839.33 3359.25,7840.75 3345,7855 3345,7951.41 3417.09,8023.5 3737.8,8023.5 3782.8,8068.5 3978.05,8068.5 4022.61,8113.07 4154.44,8113.07 ; v1(5542.5,7517.5) 5545,7515 7434.41,7515 ; MCP2551_1.3@6970,6720 7169.13,6919.13 7169.13,6961.78 7228.22,7020.87 7270.87,7020.87 7434.41,7184.41 7434.41,7515 ; Servo_Motor.2@7897.84,9991.84 7897.84,9898.23 7740.41,9740.79 7740.41,9216.99 7698.98,9175.56 7698.98,9094.29 7434.41,8829.73 7434.41,7515 ; 1428.46,6237.07 1648.49,6237.07 1800.75,6389.33 1800.75,7955 1905.75,8060 Red_Led_5V.2@2410,8060 2356.69,8006.69 2356.69,7921.78 2371.78,7906.69 2648.22,7906.69 2811.42,8069.88 2811.42,8256.53 F2.1@3009.88,8455
12V: "12 V POWER.1" "12 V POWER.2" "12 V POWER.3" C1.2 F3.1 R11.1 Red_Led_12V.2 TMC1.8 | length 8019.6
  Top Layer w20: v1(2155,9790) 2155,9600 2705.85,9049.15 2730.65,9049.15 2834.62,8945.18 2834.62,8845.58 3186.64,8493.56 3199.28,8493.56 v1(3238.92,8453.92) ; v1(3530,8200) 3715,8015 v1(3815,8015)
  Bottom Layer w20: 1738.16,9965 1935,9965 2131.85,9965 2131.85,9813.15 v1(2155,9790) ; v1(3238.92,8453.92) 3244.66,8459.66 3244.66,8503.58 3260,8518.92 3260,8580 Red_Led_12V.2@3255,8585 F3.1@3594.88,8585 ; F3.1@3615,8605.12 F3.1@3594.88,8585 ; v1@3825,8020 4828.98,8020 5010.65,8201.67 5055.57,8201.67 5093.7,8239.81 5093.7,8447.42 4975,8566.12 TMC1.8@4975,8787.5 5230,9042.5 C1.2@5230,9380.79 ; R11.1@4251.89,9320 4300.28,9271.61 4300.28,8953.86 4336.02,8918.11 4336.02,8813.35 4223.5,8700.83 4223.5,8516.18 3932.04,8224.72 3736.79,8224.72 3696.63,8184.56 3573.23,8184.56 3543.5,8214.29 3543.5,8533.62 F3.1@3594.88,8585
ADC_CURRENT_SENSOR: Actuators-NUC-H7.161 Current_Sensor.2 | length 1928.6
  Top Layer w20: v1(1700,5220) 1940,4980 v1(2260,4980)
  Bottom Layer w20: Current_Sensor.2@1295,6010 1700,5605 v1(1700,5220) ; v1(2260,4980) 2265.74,4985.74 2305.3,4985.74 2490,5170.44 Actuators-NUC-H7.161@2490,5173
CAN1_RX: J25.8 MCP2551_1.4 | length 4706.2
  Top Layer w20: v1(5560.75,7910) 6645,6825.75 v1(6645,6750)
  Bottom Layer w20: v1(5560.75,7910) 5560.75,8856.86 5885.75,9181.86 5885.75,10290 J25.8@5739.69,10436.06 ; v1@6650,6755 6835,6755 MCP2551_1.4@6970,6620
CAN1_TX: J25.7 MCP2551_1.1 | length 4554.2
  Top Layer w20: v1(5645,7910) 6140,7415 v1(6230,7415)
  Bottom Layer w20: v1@5625,7915 5625,8870.56 5921.5,9167.05 5921.5,10354.25 J25.7@5739.69,10536.06 ; v1(6230,7415) 6725,6920 MCP2551_1.1@6970,6920
DAC: Actuators-NUC-H7.207 DAC.1 | length 6034.3
  Bottom Layer w20: DAC.1@2578.43,9970 2894.25,9654.18 2894.25,9567.59 3095.91,9365.94 3095.91,9316.69 3179.72,9232.87 3179.72,9172.03 3308.31,9043.45 3308.31,8829.84 3188.17,8709.71 3188.17,6220.62 2969.25,6001.7 2969.25,5755.19 3104.44,5620 Actuators-NUC-H7.207@4290,5620
"Encoder A": "Phases Encoder.1" Actuators-NUC-H7.202 | length 5531.9
  Top Layer w20: v1@4588.66,5900 v1@4588.66,5875 ; v1(4603.66,5890) v1@4588.66,5875 ; v1(7890,8120) 7840.34,8070.34 7840.34,7775.9 7049.55,6985.12 6943.03,6985.12 6904.88,6946.97 6904.88,6789.88 6705,6590 6295.56,6590 6264.81,6559.25 5762.91,6559.25 5584.25,6380.59 5584.25,5695.41 5478.09,5589.25 4860.75,5589.25 4588.66,5861.34 v1@4588.66,5875
  Bottom Layer w20: Actuators-NUC-H7.202@4390,5920 4530,5920 4554.26,5895.74 4597.92,5895.74 v1(4603.66,5890) ; 7897.12,8229.46 7897.12,8122.88 v1@7905,8115
"Encoder B": "Phases Encoder.2" Actuators-NUC-H7.201 | length 5252.4
  Top Layer w20: v1(6700,8555) 6920,8335 v1(7855,8335)
  Bottom Layer w20: Actuators-NUC-H7.201@4290,5920 4234.33,5975.67 4234.33,6463.15 5343.04,7571.85 5373.42,7571.85 5477.06,7675.49 5492.38,7675.49 5784.34,7967.45 6112.45,7967.45 v1(6700,8555) ; v1@7845,8340 7845,8369.19 7897.12,8421.31 7897.12,8426.31
GND: 3.3V_in.2 3.3V_O/P_1.2 5V.2 12V.2 "VL BL.5" "VL BR.5" "VL FL.5" "VL FR.5" Actuators-NUC-H7.155 Actuators-NUC-H7.157 Actuators-NUC-H7.172 Actuators-NUC-H7.183 Actuators-NUC-H7.198 C1.1 Current_Sensor.3 DAC.2 GND_O/P.1 GND_O/P.2 GND_O/P.3 Green_LED_3.3V.2 Green_LED_5V.2 Green_LED_12V.2 H-Bridge_lifitng.3 J25.20 J25.21 LIMIT_SW1.2 LIMIT_SW2.2 LIMIT_SW3.2 LIMIT_SW4.2 MCP2551_1.2 Power_Encoder.2 Servo_Motor.3 SW_SPRD_TMC.1 TMC1.1 TMC1.7 TMC1.14 TMC1.15 U1.2 U1.6 U1.7 U1.8 | length 42776.3
  Top Layer w20: v1(1421.24,7985) 1477.64,8041.4 1477.64,8062.64 1528.31,8113.31 2165,8113.31 ; v1(2150,7995) 2150,8098.31 2165,8113.31 ; v1(2325,3965) 2325,3859.27 2679.27,3505 v1(2685,3505) ; v1(3160,8990) 3395.37,9225.37 3615.37,9225.37 3840,9450 v1(3845,9450) ; v1(3260.75,8089.25) 2610,8089.25 2565.75,8089.25 v1(2545,8110) 2541.69,8113.31 2165,8113.31 ; v1(5798.95,9217.39) 5807.07,9217.39 5835.13,9189.33 5881.06,9189.33 5891.06,9179.33 7463.06,9179.33 7558.5,9274.78 7558.5,9290.83 7609.17,9341.5 7625.22,9341.5 7677.4,9393.67 7677.4,9437.42 v1(7897.48,9657.5) ; v1(7060,6885) 7215,7040 v1(7420,7040) ; v1(7725,10860) 7970.83,10614.17 7970.83,9730.85 v1(7897.48,9657.5) ; v1(8065,9525) 7938.24,9651.76 7903.22,9651.76 v1(7897.48,9657.5)
  Bottom Layer w20: GND_O/P.1@1287.5,9921.57 GND_O/P.2@1287.5,9724.72 GND_O/P.3@1287.5,9527.88 ; Current_Sensor.3@1295,6206.84 1175,6326.84 ; Power_Encoder.2@1297.5,6704.73 1290.77,6711.46 1220.26,6711.46 1175,6756.72 ; 5V.2@1297.5,7017.88 1175,7140.38 ; 12V.2@1300,7666.85 1181.85,7785 1175,7785 ; v1(1421.24,7985) 1415.5,7979.26 1309.42,7979.26 3.3V_O/P_1.2@1297.5,7967.34 1292.66,7967.34 1175,8085 ; v1(2150,7995) 2150,5913 Actuators-NUC-H7.155@2490,5573 Actuators-NUC-H7.157@2490,5473 ; Actuators-NUC-H7.183@2490,4073 2383.31,3966.31 H-Bridge_lifitng.3@1295,3966.31 1280.26,3966.31 1173.28,4073.28 1175,4075 1175,5085.66 1155.51,5105.15 1155.51,5224.85 1175,5244.34 1175,6326.84 ; Actuators-NUC-H7.172@2590,4673 2824.41,4438.59 2824.41,3644.41 v1(2685,3505) ; Green_LED_5V.2@2610,8060 2602.5,8060 2552.5,8110 v1(2545,8110) 2640,8205 2640,8795 2661.69,8816.69 2666.38,8816.69 2688.07,8838.39 2728.15,8838.39 2732.29,8834.25 2934.45,8834.25 2938.59,8838.39 2968.94,8838.39 3115.56,8985 Green_LED_12V.2@3255,8985 ; v1(3260.75,8089.25) 3381.73,8089.25 3387.48,8095 3708.18,8095 3753.18,8140 3948.43,8140 4244.18,8435.75 4523.24,8435.75 TMC1.7@4975,8887.5 ; v1(3845,9450) 3983.15,9450 SW_SPRD_TMC.1@4033.15,9500 ; Actuators-NUC-H7.198@4390,6120 5380,6120 5455,6045 ; TMC1.14@4477.36,8987.51 TMC1.15@4477.36,8887.51 TMC1.7@4975,8887.5 ; LIMIT_SW1.2@4830,10606.85 4902.99,10533.86 ; TMC1.1@4975,9487.5 4979.14,9483.36 5225.86,9483.36 C1.1@5230,9479.21 5180.63,9429.84 5180.63,9143.62 5194.25,9130 5194.25,9106.76 TMC1.7@4975,8887.5 ; v1(5798.95,9217.39) 5790.84,9217.39 5779.79,9228.43 5747.31,9228.43 J25.20@5739.69,9236.06 5614.69,9236.06 5545.75,9305 5545.75,9891.1 4902.99,10533.86 ; 6170,4655 6223.5,4601.5 6244.66,4601.5 6246.91,4599.25 6293.09,4599.25 6775,5081.16 6775,5560 6585,5750 6495.75,5660.75 6495.75,5307.46 6408.28,5220 6349.16,5220 5816.66,5752.5 U1.8@5735,5752.5 U1.7@5735,5852.5 U1.6@5735,5952.5 5642.5,6045 5455,6045 ; v1(7060,6885) 7054.26,6879.26 7029.26,6879.26 MCP2551_1.2@6970,6820 6954.1,6820 6938.36,6835.75 6210.75,6835.75 6155,6780 6063.5,6871.5 5717.1,6871.5 5605,6759.39 5605,6726.55 5790.75,6540.8 5790.75,6408.25 U1.2@5735,6352.5 5675.43,6292.93 5636.16,6292.93 5549.41,6206.18 5549.41,6139.41 5455,6045 ; v1(7420,7040) 7897.12,7517.12 LIMIT_SW2.2@7897.12,7532.61 8225,7860.49 8225,9403.28 8213.28,9415 8175,9415 v1(8065,9525) ; J25.21@7440,11135 7887.76,10687.24 7887.76,10617.24 LIMIT_SW4.2@7895,10610 ; LIMIT_SW3.2@7897.12,9520 7897.48,9520.36 v1(7897.48,9657.5) 7897.48,9794.64 Servo_Motor.3@7897.84,9795 ; 1175,6326.84 1175,6756.72 ; 1175,6756.72 1175,7140.38 ; 1175,7140.38 1175,7785 ; 1175,7785 1175,8085 ; 1175,8085 1175,8930.38 3.3V_in.2@1297.5,9052.88 1215,9135.38 1215,9455.38 GND_O/P.3@1287.5,9527.88 ; GND_O/P.3@1287.5,9527.88 1892.12,9527.88 Green_LED_3.3V.2@1965,9455 2381.58,9871.58 DAC.2@2381.58,9970 2591.58,10180 4703.23,10180 4902.99,10379.77 4902.99,10533.86
I2C_0_SCL: Actuators-NUC-H7.224 U1.3 | length 2272.9
  Top Layer w20: v1(4465,4815) 4906.05,5256.05 5195.44,5256.05 5634.25,5694.86 5634.25,6219.25 v1(5635,6220)
  Bottom Layer w20: Actuators-NUC-H7.224@4390,4773 4400.74,4773 4437.74,4810 v1@4475,4810 ; v1(5635,6220) 5643.12,6220 5675,6251.88 5734.38,6251.88 U1.3@5735,6252.5